# Altium PCB ISL6236A_DEMO.PcbDoc (part 2 of 2)
Units mm, origin at the board's own origin, x right, y up, seen from the top; angles counter-clockwise.
Board outline 50 x 50 mm, 6 copper layers (Top Layer (L1), GND (L2), L3, L4, GND (L5), Bottom Layer (L6)), stack 0.876 mm thick; 41 components, 27 nets, 119 pads, 105 vias.
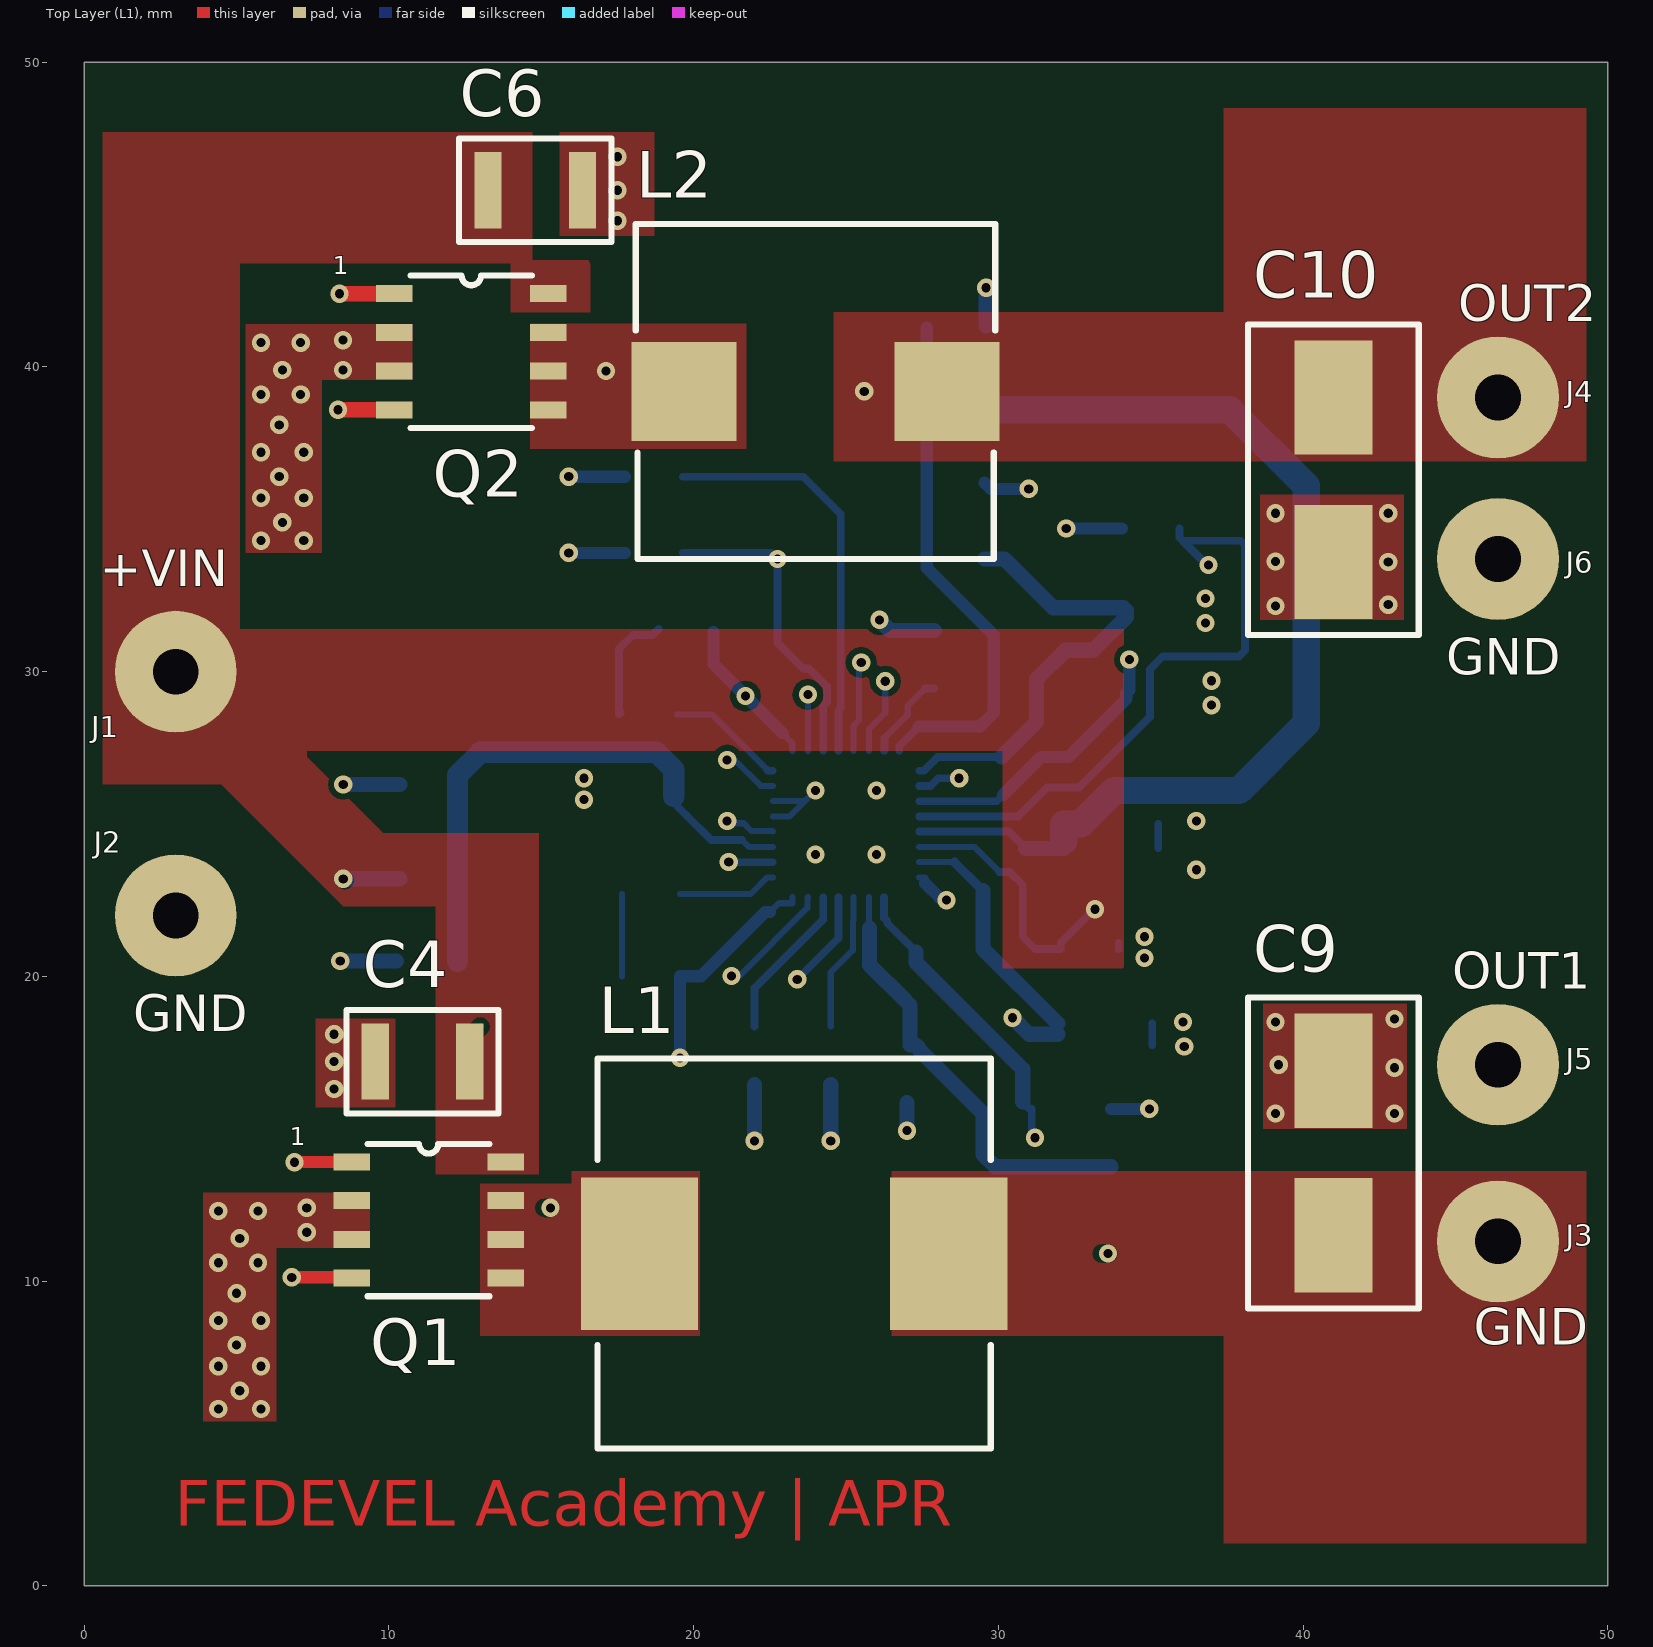
[diagram p0: Top Layer (L1) view]

## Polygon pours and split planes (outlines as drawn) (continued)
no net on Top Layer (L1) "NONET_L01_P004" (solid, pour order 4): 23.2,39.3
GND on Bottom Layer (L6) "GND_L06_P036" (solid, pour order 36): 14.6,25.8
GND on Bottom Layer (L6) "GND_L06_P035" (solid, pour order 35): 16,26.9 18.3,26.9 18.3,25.1 16,25.1
GND on Bottom Layer (L6) "GND_L06_P034" (solid, pour order 34): 34.6,19 36.4,19 36.4,17.3 34.6,17.3
GND on Bottom Layer (L6) "GND_L06_P033" (solid, pour order 33): 33.4,21.7 35.2,21.7 35.2,20 33.4,20
GND on Bottom Layer (L6) "GND_L06_P032" (solid, pour order 32): 34.6,25.45 36.9,25.45 36.9,22.8 34.6,22.8
GND on Bottom Layer (L6) "GND_L06_P031" (solid, pour order 31): 35.6,30.1 37.4,30.1 37.4,28.4 35.6,28.4
GND on Bottom Layer (L6) "GND_L06_P030" (solid, pour order 30): 35.5,32.8 37.3,32.8 37.3,31.1 35.5,31.1
GND on Bottom Layer (L6) "GND_L06_P027" (solid, pour order 27): 36.3,31
GND on Bottom Layer (L6) "GND_L06_P026" (solid, pour order 26): 36.8,30.9
"+5V VCC" on L4 "+5V_VCC_L04_P046" (solid, pour order 46): 10.8,14.6 10.8,5.1 36.5,5.1 36.5,14.554 36.454,14.6
"+5V VCC" on L4 "+5V_VCC_L04_P045" (solid, pour order 45): 36.5,43.1 36.5,14.554 5.4,14.554 5.4,43.1
GND on L4 "GND_L04_P044" (solid, pour order 44): 11.3,41.8
GND on GND (L2) (split plane): 49.49,0.51 0.51,0.51 0.51,49.49 49.49,49.49
GND on GND (L5) (split plane): 49.49,0.51 0.51,0.51 0.51,49.49 49.49,49.49

## Other copper
Top Layer (L1):
  text "FEDEVEL Academy | APR" at 2.96,1.96 h1.5

## Silkscreen, mask and mechanical layers (free items; w line width, h text height)
Top Overlay:
  text "1" at 8.15,43.05 h0.6
  text "OUT2" at 45.1,41.5 h1.2
  text "+VIN" at 0.5,32.8 h1.2
  text "GND" at 44.7,29.9 h1.2
  text "OUT1" at 44.9,19.6 h1.2
  text "GND" at 1.6,18.2 h1.2
  text "1" at 6.75,14.45 h0.6
  text "GND" at 45.6,7.9 h1.2
Bottom Overlay:
  text "ISL6236A_DEMO V1|1" at 47,47.167 h1.6
  text "1" at 28.25,27.05 h0.5
  text "(C) 2021 FEDEVEL" at 48.7,0.9 h1.6
Top Solder:
  text "FEDEVEL Academy | APR" at 2.95,1.95 h1.5
Mechanical 1:
  the board outline again, w0.1